# Altium PCB MediaControllerPCB.PcbDoc
Units mm, origin at the board's own origin, x right, y up, seen from the top; angles counter-clockwise.
Board outline 60.08 x 80.08 mm, 2 copper layers (Top Layer, Bottom Layer); 60 components, 40 nets, 222 pads, 50 vias.
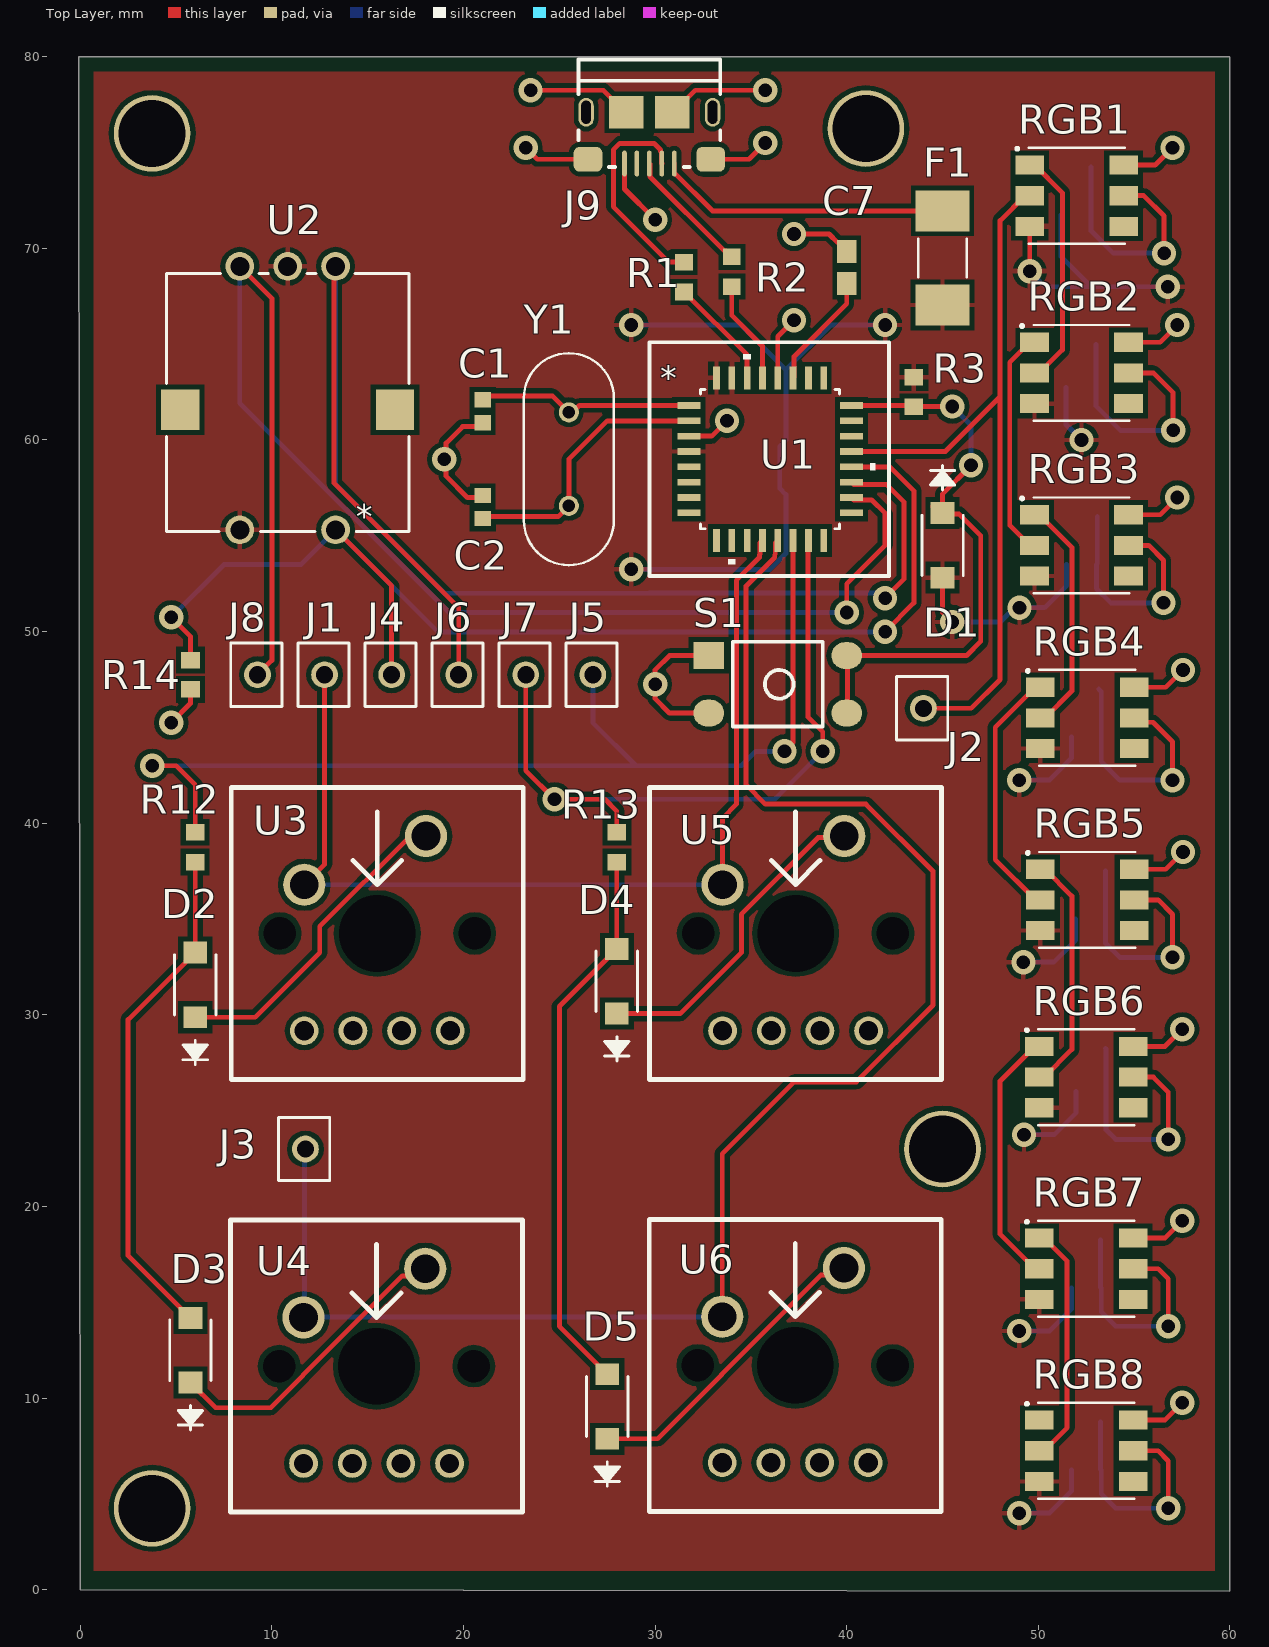
[diagram p0: Top Layer view]
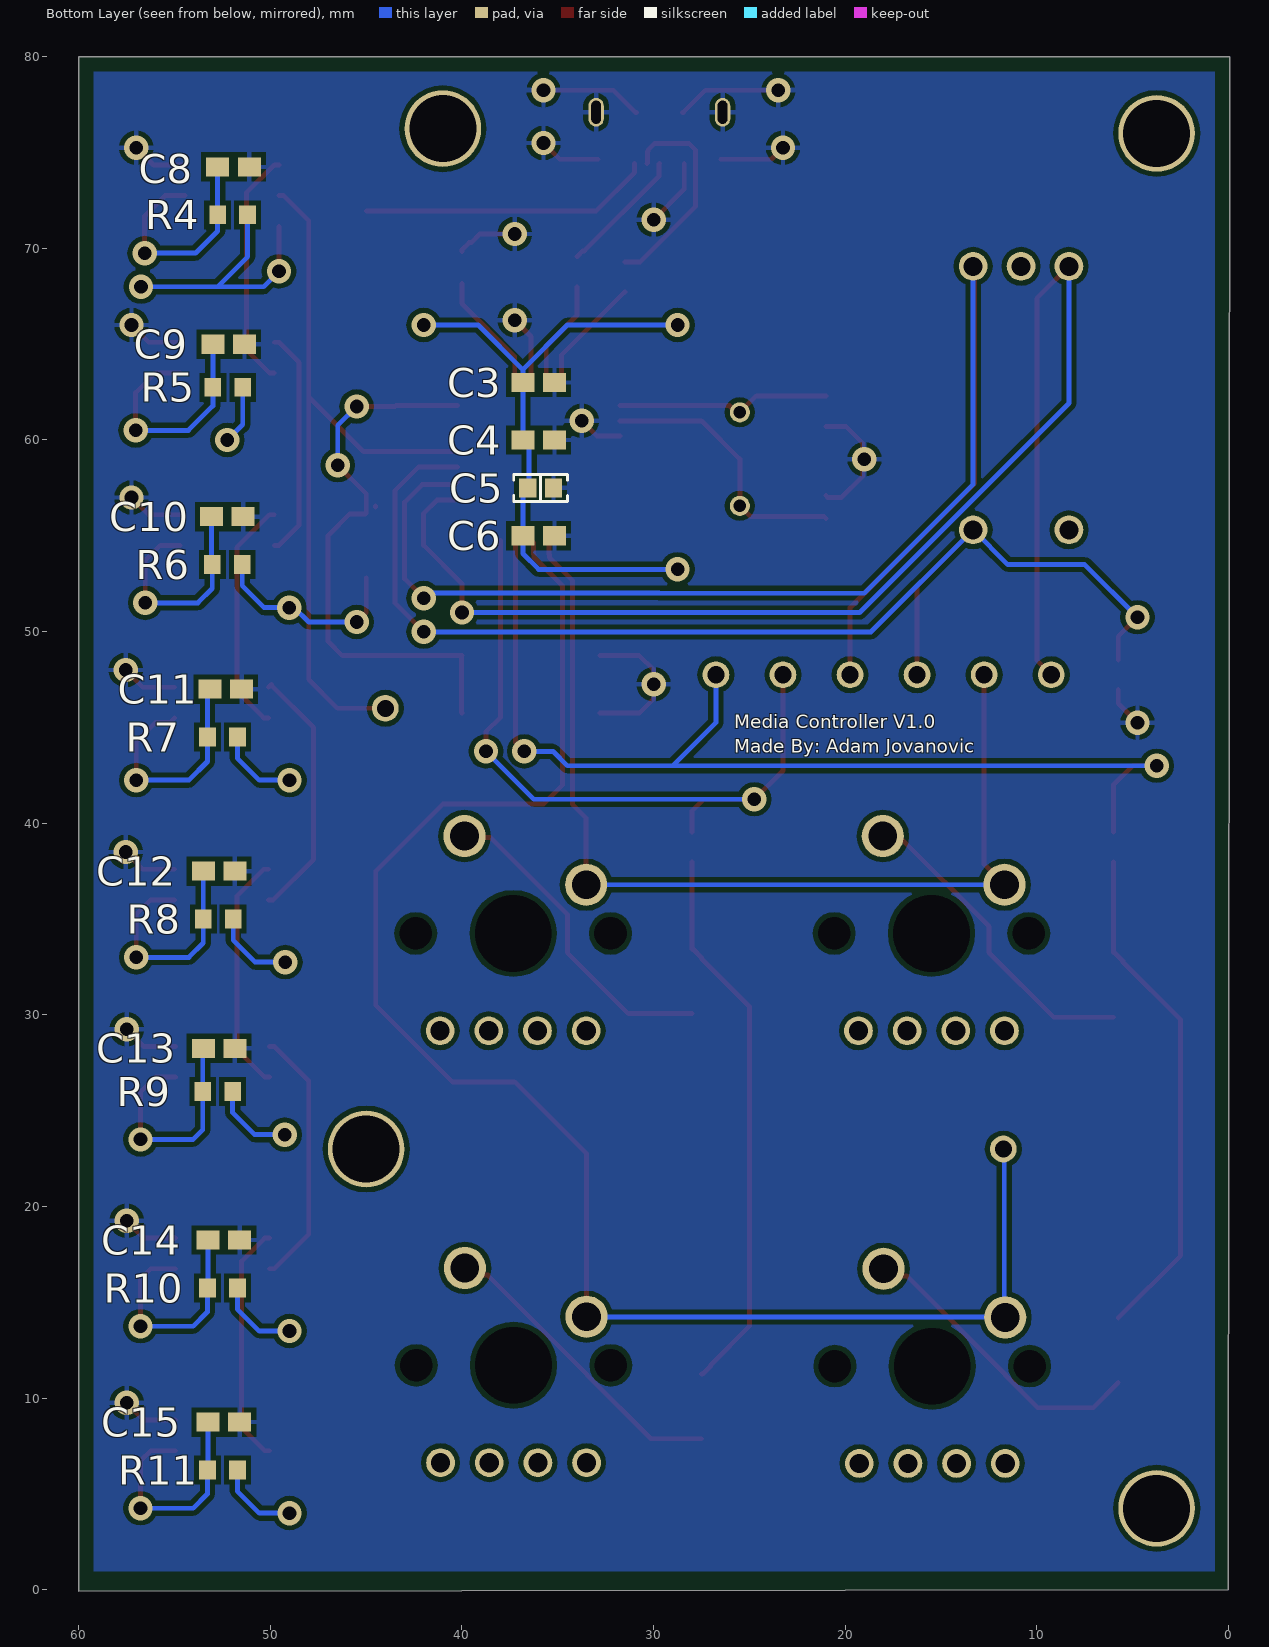
[diagram p1: Bottom Layer view, seen from below]
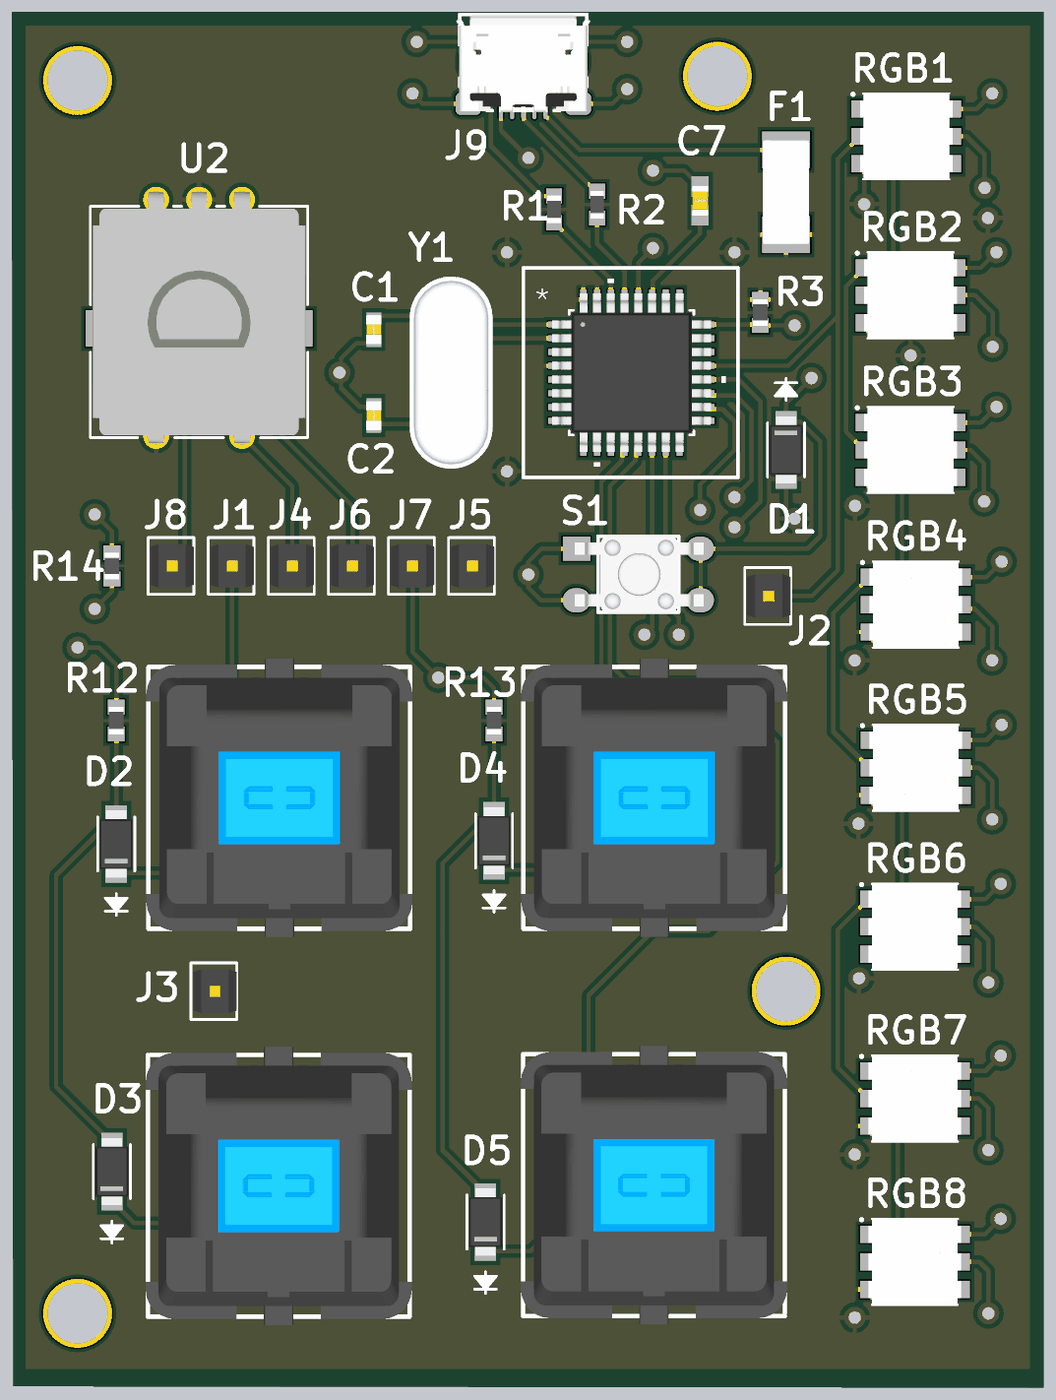
[diagram p2: 3D render of the assembled board from above, using the file's embedded part models]
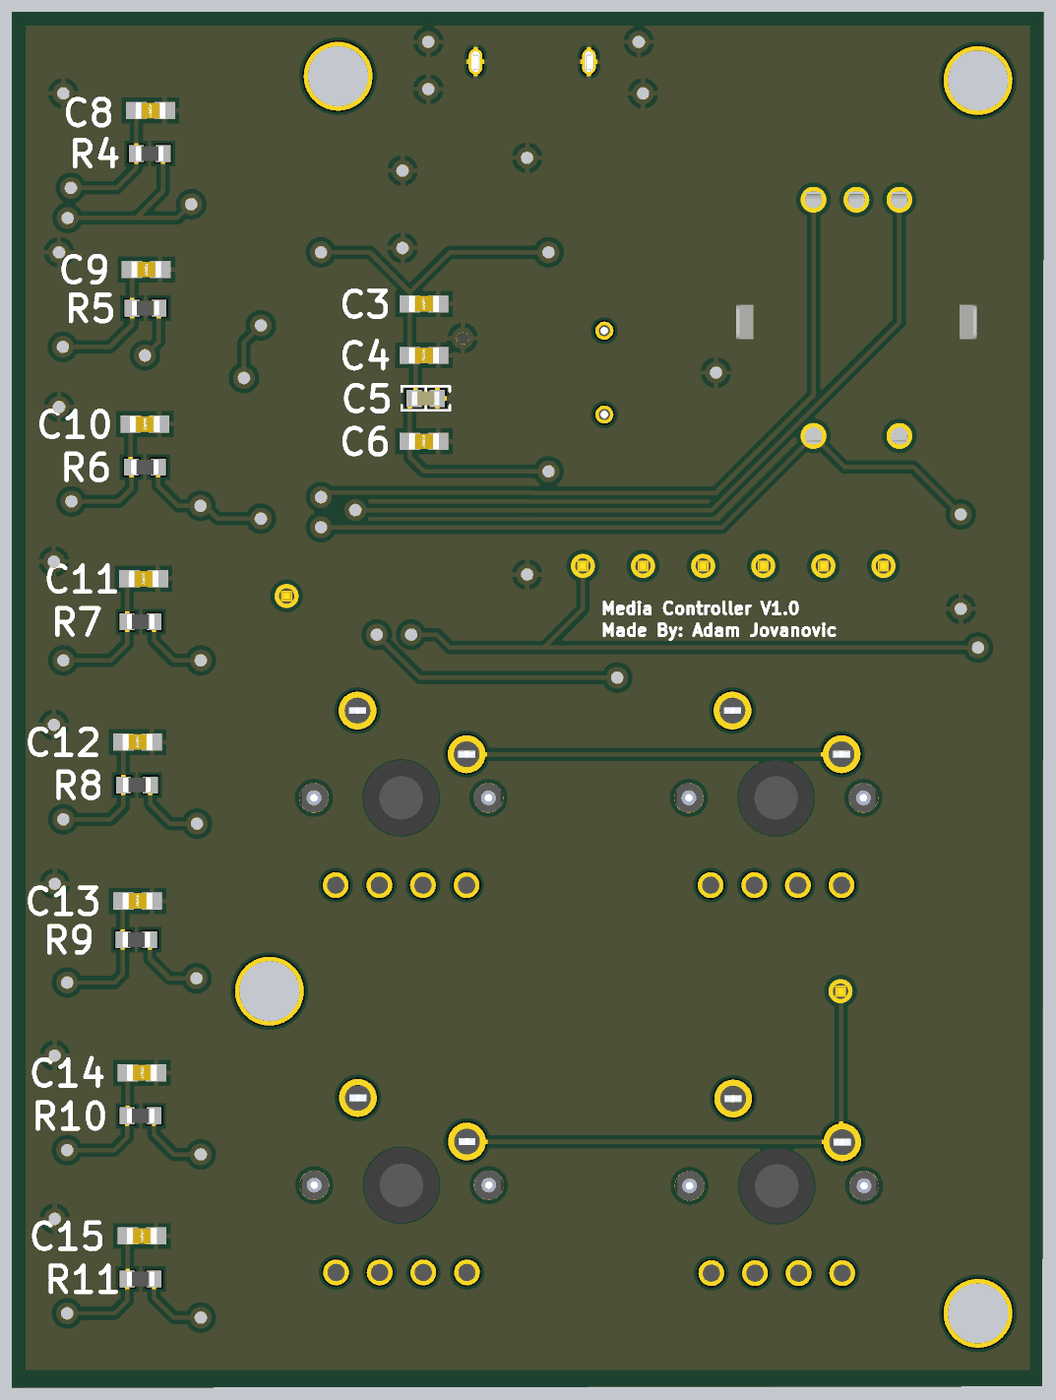
[diagram p3: 3D render of the assembled board from below, using the file's embedded part models]

## Layer stack, top to bottom
Top Solder: solder mask 0.0102, Solder Resist, Dk 3.5
Top Layer: signal copper 0.0356
Dielectric 1: dielectric 0.32, FR-4, Dk 4.8
Bottom Layer: signal copper 0.0356
Bottom Solder: solder mask 0.0102, Solder Resist, Dk 3.5

## Board outline
0,0 60,-0.079 60,80 -0.079,80

## Design rules (kind name [scope] priority, off if disabled: settings)
Clearance [All] p1: gap=0.254 ignorepadtopadclearanceinfootprint=TRUE except(0: Arc-Hole Track-Hole SMDPad-Hole THPad-Hole Via-Hole Fill-Hole Poly-Hole Region-Hole Text-Hole)
HoleSize [All] p1: absolutevalues=TRUE maxlimit=5 minlimit=0.3 maxpercent=80.000 minpercent=20.000
MatchedLengths [InNetClass('USB')] p1: tolerance=10 checknetsindiffpair=FALSE checkdiffpairvsdiffpair=TRUE checkxsignals=TRUE checkothers=TRUE
MinimumSolderMaskSliver [All] p1: minsoldermaskwidth=0.2
PolygonConnect [All] p1: connectstyle=Relief reliefconductorwidth=0.254 reliefentries=4 polygonreliefangle="90 Angle" airgapwidth=0.254
RoutingVias [All] p1: holewidth=0.711 width=1.27 viastyle="Through Hole" minholewidth=0.711 minwidth=1.27 maxholewidth=0.711 maxwidth=1.27
SilkToSolderMaskClearance [IsPad] p1: minsilkscreentomaskgap=0.1 clearancetoexposedcopper=TRUE
SolderMaskExpansion [All] p1: expansion=0.102 istentingtop=FALSE
Width [All] p1: maxlimit=0.254 minlimit=0.254 preferedwidth=0.254
27 further rules are at their usual default settings.

## Components (designator, comment, footprint, x,y, rotation, side; value= is the part's Value field where it differs from the comment)
C1 "10uF" CAPC17090_87N_KEM-L 21,61.5 r90 top
C2 "10uF" CAPC17090_87N_KEM-L 21,56.5 r270 top
C3 "100nF" CAPC0603_87N_KEM-M 36,63 r0 bottom
C4 "100nF" CAPC0603_87N_KEM-M 36,60 r0 bottom
C5 "10µF" "CAP 0603_1608" 35.9,57.5 r0 bottom
C6 "100nF" CAPC0603_87N_KEM-M 36,55 r0 bottom
C7 "1uF CAP" 1UFCAP-M 40,69 r270 top
C8 "100nF" CAPC0603_87N_KEM-M 51.925,74.25 r0 bottom
C9 "100nF" CAPC0603_87N_KEM-M 52.175,65 r0 bottom
C10 "100nF" CAPC0603_87N_KEM-M 52.25,56 r0 bottom
C11 "100nF" CAPC0603_87N_KEM-M 52.325,47 r0 bottom
C12 "100nF" CAPC0603_87N_KEM-M 52.675,37.5 r0 bottom
C13 "100nF" CAPC0603_87N_KEM-M 52.675,28.25 r0 bottom
C14 "100nF" CAPC0603_87N_KEM-M 52.425,18.25 r0 bottom
C15 "100nF" CAPC0603_87N_KEM-M 52.425,8.75 r0 bottom
D1 "RectifierDiode" DO-219AB_VIS-M 45,54.5 r270 top
D2 "RectifierDiode" DO-219AB_VIS-M 6,31.563 r90 top
D3 "RectifierDiode" DO-219AB_VIS-M 5.75,12.5 r90 top
D4 "RectifierDiode" DO-219AB_VIS-M 28,31.75 r90 top
D5 "RectifierDiode" DO-219AB_VIS-M 27.5,9.563 r90 top
F1 "500mAFuse" FUSC6125X279N 45,69.5 r270 top
J1 "Single Pin Header" CON1_1X1_TU_TSW 12.75,47.75 r90 top
J2 "Single Pin Header" CON1_1X1_TU_TSW 44,46 r90 top
J3 "Single Pin Header" CON1_1X1_TU_TSW 11.75,23 r90 top
J4 "Single Pin Header" CON1_1X1_TU_TSW 16.25,47.75 r90 top
J5 "Single Pin Header" CON1_1X1_TU_TSW 26.75,47.75 r90 top
J6 "Single Pin Header" CON1_1X1_TU_TSW 19.75,47.75 r90 top
J7 "Single Pin Header" CON1_1X1_TU_TSW 23.25,47.75 r90 top
J8 "Single Pin Header" CON1_1X1_TU_TSW 9.25,47.75 r90 top
J9 "10118193-0001LF" "FCI USB 10118193-0001LF" 29.7,77.05 r0 top
R1 "22R" RES0603_22OHM 31.5,68.5 r90 top
R2 "22R" RES0603_22OHM 34,68.78 r90 top
R3 "10KRES" RES0603 43.5,62.5 r90 top
R4 "150R" RES0608_150OHM 51.97,71.75 r0 bottom
R5 "150R" RES0608_150OHM 52.22,62.75 r0 bottom
R6 "150R" RES0608_150OHM 52.25,53.5 r0 bottom
R7 "150R" RES0608_150OHM 52.5,44.5 r0 bottom
R8 "150R" RES0608_150OHM 52.72,35 r0 bottom
R9 "150R" RES0608_150OHM 52.75,26 r0 bottom
R10 "150R" RES0608_150OHM 52.5,15.75 r0 bottom
R11 "150R" RES0608_150OHM 52.5,6.25 r0 bottom
R12 "150R" RES0608_150OHM 6,38.75 r90 top
R13 "150R" RES0608_150OHM 28,38.75 r90 top
R14 "10KRES" RES0603 5.75,47.75 r90 top
RGB1 "RGB-LED" LED_RGB 52,72.75 r0 top
RGB2 "RGB-LED" LED_RGB 52.25,63.5 r0 top
RGB3 "RGB-LED" LED_RGB 52.25,54.5 r0 top
RGB4 "RGB-LED" LED_RGB 52.55,45.5 r0 top
RGB5 "RGB-LED" LED_RGB 52.55,36 r0 top
RGB6 "RGB-LED" LED_RGB 52.5,26.75 r0 top
RGB7 "RGB-LED" LED_RGB 52.5,16.75 r0 top
RGB8 "RGB-LED" LED_RGB 52.5,7.25 r0 top
S1 "TacticalSwitch" TACTILESWITCH 32.8,48.75 r0 top
U1 "ATMEGA32U2-AU" 32A_ATM 36,59 r0 top
U2 "EN12-HS22AF20" EN12-HS_TTE 11,62.5 r180 top
U3 "Switch" CHERRYMX_5PIN 15.5,34.25 r0 top
U4 "Switch" CHERRYMX_5PIN 15.46,11.67 r0 top
U5 "Switch" CHERRYMX_5PIN 37.33,34.25 r0 top
U6 "Switch" CHERRYMX_5PIN 37.31,11.71 r0 top
Y1 "LFXTAL003240BULK" LFXTAL003240BULK 25.5,59 r90 top

## Footprints (in the part's own frame and the unit in brackets; to place one, negate y for a bottom-side part, rotate by r counter-clockwise, add the part's x,y. Pads: shape width x height; smd on the part's side, far side on the other; paste and mask are expansions set on the pad)
1UFCAP-M [mm]
  rect 1.2x1 smd paste+0 mask+0: 1(-0.825,0) 2(0.825,0)
  body extent -0.87,-0.48 0.87,0.48, height 0.91
32A_ATM [mm]
  rect 1.2x0.35 smd: 1(-4.242,2.8) 2(-4.242,2) 3(-4.242,1.2) 4(-4.242,0.4) 5(-4.242,-0.4) 6(-4.242,-1.2) 7(-4.242,-2) 8(-4.242,-2.8) 17(4.242,-2.8) 18(4.242,-2) 19(4.242,-1.2) 20(4.242,-0.4) 21(4.242,0.4) 22(4.242,1.2) 23(4.242,2) 24(4.242,2.8)
  rect 0.35x1.2 smd: 9(-2.8,-4.242) 10(-2,-4.242) 11(-1.2,-4.242) 12(-0.4,-4.242) 13(0.4,-4.242) 14(1.2,-4.242) 15(2,-4.242) 16(2.8,-4.242) 25(2.8,4.242) 26(2,4.242) 27(1.2,4.242) 28(0.4,4.242) 29(-0.4,4.242) 30(-1.2,4.242) 31(-2,4.242) 32(-2.8,4.242)
  silkscreen extent -6.3,-6.1 6.2,6.1, body extent -4.62,-4.62 4.62,4.62, height 1.2
"CAP 0603_1608" [mm] "Chip Capacitor, 2-Leads, Body 1.60x0.80mm, IPC Medium Density"
  rect 0.9x1 smd: 1(-0.675,0) 2(0.675,0)
  silkscreen extent -1.4,-0.7 1.4,0.7, body extent -0.8,-0.41 0.8,0.41, height 0.82
CAPC0603_87N_KEM-M [mm]
  rect 1.2x1 smd paste+0 mask+0: 1(-0.825,0) 2(0.825,0)
  body extent -0.88,-0.48 0.87,0.47, height 0.88
CAPC17090_87N_KEM-L [mm]
  rect 0.8x0.85 smd paste+0 mask+0: 1(-0.6,0) 2(0.6,0)
  body extent -0.85,-0.45 0.85,0.45, height 0.88
CHERRYMX_5PIN [mm] "Cherry MX 5 pin mechanical keyboard switch"
  round 2.2 hole 1.5: 1(-3.81,2.54) 2(2.54,5.08)
  round 1.5 hole 1: 3(-1.27,-5.08) 4(1.27,-5.08) 5(-3.81,-5.08) 6(3.81,-5.08)
  round 0 hole 1.7: PE(-5.08,0) PE(5.08,0)
  round 0 hole 4: PE(0,0)
  silkscreen extent -7.62,-7.62 7.62,7.62, body extent -7.75,-8.1 7.75,8.1, height 14.87
CON1_1X1_TU_TSW [mil]
  round 55 hole 35 mask+0: 1(0,0)
  silkscreen extent -65,-50 65,55, body extent -50,-50 50,50, height 500
DO-219AB_VIS-M [mm]
  rect 1.138x1.244 smd paste+0 mask+0: 1(-1.687,0) 2(1.687,0)
  silkscreen extent -4.16,-1.08 1.57,1.08, body extent -1.96,-0.95 1.96,0.95, height 0.83
EN12-HS_TTE [mil]
  round 59 hole 39 mask+0: 1(-91.54,-258.39) 2(105.32,-258.39) 3(6.89,-258.39) 4(-91.54,282.95) 5(105.32,282.95)
  rect 79x83 smd: 6(-213.61,36.61) 7(227.39,36.61)
  silkscreen extent -242,-243 256,287, body extent -269,-276 282,299, height 788
"FCI USB 10118193-0001LF" [mm] "USB 2.0 Type B Micro"
  oval 0.24x1.35 smd: 1(1.3,-2.625) 2(0.65,-2.625) 3(0,-2.625) 4(-0.65,-2.625) 5(-1.3,-2.625)
  oval 0.8x1.5 hole 0.5 slot 1.2 at 90 deg: S(-3.3,0.05) S(3.3,0.05)
  rrect50% 1.5x1.3 smd: S(-3.2,-2.4) S(3.2,-2.4)
  rect 1.8x1.7 smd: S(-1.2,0.05) S(1.2,0.05)
  silkscreen extent -3.7,-2.8 3.7,2.8, body extent -3.93,-2.9 3.93,2.76, height 2.78
FUSC6125X279N [mm]
  rect 2.15x2.8 smd: 1(-2.455,0) 2(2.455,0)
  silkscreen extent -1,-1.27 1,1.27, body extent -3.05,-1.4 3.05,1.39, height 2.55
LED_RGB [mm]
  rect 1.5x1 smd: 1(-2.45,1.6) 2(-2.45,0) 3(-2.45,-1.6) 4(2.45,-1.6) 5(2.45,0) 6(2.45,1.6)
  silkscreen extent -3.15,-2.5 2.5,2.5, body extent -2.7,-2.5 2.7,2.5, height 1.76
LFXTAL003240BULK [mm] "CRYSTAL 16.0000MHZ 30PF TH"
  round 1.05 hole 0.65: 1(-2.44,0) 2(2.44,0)
  silkscreen extent -5.53,-2.35 5.53,2.35, body extent -5.53,-2.35 5.52,2.35, height 4.11
RES0603 [mm]
  rect 0.86x0.98 smd: 1(-0.765,0) 2(0.765,0)
  body extent -0.78,-0.43 0.78,0.43, height 0.51
RES0603_22OHM [mm]
  rect 0.87x0.93 smd: 1(-0.78,0) 2(0.78,0)
  body extent -0.8,-0.4 0.8,0.4, height 0.55
RES0608_150OHM [mm]
  rect 0.87x0.98 smd: 1(-0.78,0) 2(0.78,0)
  body extent -0.8,-0.43 0.8,0.43, height 0.56
TACTILESWITCH [mm]
  rect 1.6x1.4 smd: 1(0,0)
  oval 1.6x1.4 smd: 2(0,-3) 3(7.2,-3) 4(7.2,0)
  silkscreen extent 1.25,-3.7 5.95,0.72, body extent -0.1,-3.75 7.4,0.75, height 3.7

## Part data
C1 C2: library part 10pFCap, "Multilayer Ceramic Capacitors MLCC - SMD/SMT 50V 10pF C0G 0603 5%", Manufacturer_Part_Number=CBR06C100J5GAC, Built_By=EMA_Frank, Copyright="Copyright (C) 2021 Accelerated Designs. All rights reserved", RefDes=RefDes, Source_Library=Kemet_2020-03-25_3.xlr, SourceLibrary=Kemet_2020-03-25_3, Type=DEV, Vendor=Kemet
C3 C4 C6 C8 C9 C10 C11 C12 C13 C14 C15: library part C0603C103J5JACTU, "CAP CER 10000PF 50V U2J 0603", Capacitance=10nF, Case Code (Imperial)=0603, Case Code (Metric)=1608, Dielectric=U2J, Manufacturer=KEMET, Max Operating Temperature=125°C, Min Operating Temperature=-55°C, Supplier Part Number 1=399-13384-1-ND, Tolerance=5%, Voltage Rating=50V, Case/Package=0603, Category="Ceramic Capacitors", ComponentLink1Description=http://www.farnell.com/datasheets/2600114.pdf?src-supplier=Farnell, ComponentLink1URL=http://www.farnell.com/datasheets/2600114.pdf?src-supplier=Farnell, ComponentLink2Description=http://www.farnell.com/datasheets/2157975.pdf?src-supplier=Element14, ComponentLink2URL=http://www.farnell.com/datasheets/2157975.pdf?src-supplier=Element14, ComponentLink3Description=https://api.kemet.com/component-edge/download/datasheet/C0603C103J5JAC7867.pdf?src-supplier=Digi-Key, ComponentLink3URL=https://api.kemet.com/component-edge/download/datasheet/C0603C103J5JAC7867.pdf?src-supplier=Digi-Key, ComponentLink4Description=http://www.kemet.com/docfinder?Partnumber=C0603C103J5JAC7867&src-supplier=Digi-Key, ComponentLink4URL=http://www.kemet.com/docfinder?Partnumber=C0603C103J5JAC7867&src-supplier=Digi-Key, Length=0.063inch, Manufacturer Part Number=C0603C103J5JACTU, Mount="Surface Mount", Packaging="Cut Tape", Pricing 1="1=0.30000, 10=0.20400, 50=0.13560, 100=0.11530, 500=0.08142, 1000=0.07124 (USD)", REACH SVHC="No SVHC", RoHS=Yes, RoHS Compliant=Yes, Stock 1=2465, Supplier 1=Digi-Key, Thickness=0.034inch, Width=0.032inch
C5: library part GRM188R61E106MA73D, "CAP CER 10UF 25V X5R 0603", Device Package="0603 (1608 Metric)", Manufacturer="Murata Electronics", Operating Temperature="-55°C ~ 85°C", Supplier Part Number 1=490-7202-1-ND, Temperature Coefficient=X5R, Tolerance=±20%, Voltage - Rated=25V, Applications="General Purpose", Capacitance=10µF, ComponentLink1Description=Datasheet, ComponentLink1URL=https://www.murata.com/~/media/webrenewal/support/library/catalog/products/capacitor/mlcc/c02e.ashx?la=en-us, ComponentLink2Description="DigiKey Link", ComponentLink2URL=http://digikey.com/product-detail/en/murata-electronics/GRM188R61E106MA73D/490-7202-1-ND/3900486, LastUpdated="2/09/2020 1:03:25 AM", Lifecycle Status=Active, Minimum Order=1, Mounting Type="Surface Mount, MLCC", Package / Case="0603 (1608 Metric)", Packaging=TapeAndReel, Part Number=GRM188R61E106MA73D, Part Status=Active, PartId=8314, Price=0.09, Series=GRM, Size / Dimension="0.063\" L x 0.031\" W (1.60mm x 0.80mm)", Supplier 1=DigiKey, Thickness (Max)="0.031\" (0.80mm)"
C7: library part 1uFCap, "KEMET - C0603C105K8PACTU - SMD Multilayer Ceramic Capacitor, 1 µF, 10 V, 0603 [1608 Metric], ± 10%, X5R, C Series KEMET", Capacitance=1uF, Case Code (Imperial)=0603, Case Code (Metric)=1608, Dielectric=X5R, Dielectric Material=Ceramic, Manufacturer=KEMET, Manufacturer Part Number=C0603C105K8PACTU, Max Operating Temperature=85°C, Min Operating Temperature=-55°C, Package Quantity=1, Supplier Part Number 1=399-3118-1-ND, Tolerance=10%, Voltage=10V, Case/Package=0603, Category="Ceramic Capacitors", ComponentLink1Description=https://datasheet.ciiva.com/11787/0900766b8116eb59-11787747.pdf?src-supplier=RSComponents, ComponentLink1URL=https://datasheet.ciiva.com/11787/0900766b8116eb59-11787747.pdf?src-supplier=RSComponents, ComponentLink2Description=https://datasheet.ciiva.com/6074/40889-6074647.pdf?src-supplier=Farnell, ComponentLink2URL=https://datasheet.ciiva.com/6074/40889-6074647.pdf?src-supplier=Farnell, ComponentLink3Description=https://datasheet.ciiva.com/26847/getdatasheetpartid-385480-26847548.pdf?src-supplier=Verical, ComponentLink3URL=https://datasheet.ciiva.com/26847/getdatasheetpartid-385480-26847548.pdf?src-supplier=Verical, ComponentLink4Description=https://datasheet.ciiva.com/7823/40889-7823998.pdf?src-supplier=Element14, ComponentLink4URL=https://datasheet.ciiva.com/7823/40889-7823998.pdf?src-supplier=Element14, ComponentLink5Description=https://datasheet.ciiva.com/7823/1929483-7823999.pdf?src-supplier=Element14, ComponentLink5URL=https://datasheet.ciiva.com/7823/1929483-7823999.pdf?src-supplier=Element14, ComponentLink6Description=https://datasheet.ciiva.com/28645/1831760-28645655.pdf?src-supplier=Element14, ComponentLink6URL=https://datasheet.ciiva.com/28645/1831760-28645655.pdf?src-supplier=Element14, Construction=Flat, Depth=0.8mm, Height=0.8mm, Lead Free="Lead Free", Length=1.6mm, Mount="Surface Mount", Number of Pins=2, Packaging="Tape and Reel", Pricing 1="1=0.10000, 10=0.05600, 50=0.03040, 100=0.02480, 500=0.01772, 1000=0.01392 (USD)", Radiation Hardening=No, REACH SVHC="No SVHC", RoHS=Yes, RoHS Compliant=Yes, Series=C, Stock 1=16016, Supplier 1=Digi-Key, Termination=SMD/SMT, Thickness=0.035inch, Voltage Rating=10V, Voltage Rating (DC)=10V, Weight=7.1E-05oz, Width=0.031inch
D1 D2 D3 D4 D5: library part ES07D-GS08, "VISHAY - ES07D-GS08 - Fast / Ultrafast Diode, 200 V, 1.2 A, Single, 980 mV, 25 ns, 30 A", Manufacturer=Vishay, Supplier Part Number 1=ES07D-GS08CT-ND, Category="Rectifier Diodes", ComponentLink1Description=http://www.farnell.com/datasheets/2046053.pdf?src-supplier=Farnell, ComponentLink1URL=http://www.farnell.com/datasheets/2046053.pdf?src-supplier=Farnell, Manufacturer Part Number=ES07D-GS08, Pricing 1="1=0.45000, 10=0.36200, 100=0.24640, 500=0.18480, 1000=0.13860 (USD)", RoHS=Yes, RoHS Compliant=Yes, Stock 1=4306, Supplier 1=Digi-Key
F1: library part Fuse, "Fuse Chip Fast Acting 0.5A 350V Solder Pad SMD 2410 Ceramic T/R", Case Code (Imperial)=2410, Case Code (Metric)=6125, Current Rating=500mA, DC Cold Resistance=240mR, Manufacturer=Bel, Manufacturer Part Number=0679H0500-05, Max Operating Temperature=125°C, Min Operating Temperature=-55°C, Supplier Part Number 1=507-2043-2-ND, Voltage Rating (AC)=350V, Voltage Rating (DC)=72V, Approvals=cURus, Case/Package=2410, Category=Fuses, ComponentLink1Description=https://www.mouser.com/ds/2/643/0679H_Jan_2017-1131342.pdf?src-supplier=Mouser, ComponentLink1URL=https://www.mouser.com/ds/2/643/0679H_Jan_2017-1131342.pdf?src-supplier=Mouser, ComponentLink2Description=https://www.belfuse.com/resources/CircuitProtection/datasheets/0679H%20Jan%202017.pdf?src-supplier=Digi-Key, ComponentLink2URL=https://www.belfuse.com/resources/CircuitProtection/datasheets/0679H%20Jan%202017.pdf?src-supplier=Digi-Key, Fuse Type="Board Mount (Cartridge Style Excluded)", Mount="Surface Mount", Packaging="Tape and Reel", Pricing 1="5000=0.14057, 10000=0.13120 (USD)", RoHS=Yes, RoHS Compliant=Yes, Stock 1=5000, Supplier 1=Digi-Key
J1 J2 J3 J4 J5 J6 J7 J8: library part TSW-101-07-F-S, "Samtec TSW, 1 Way, 1 Row, Straight PCB Header", Flammability Rating="UL94 V-0", Insulation Color=Black, Manufacturer=Samtec, Max Operating Temperature=125°C, Min Operating Temperature=-55°C, Supplier Part Number 1=SAM10323-ND, Category=Connectors, ComponentLink1Description=https://datasheet.ciiva.com/10337/htsw-th-10337052.pdf?src-supplier=Avnet, ComponentLink1URL=https://datasheet.ciiva.com/10337/htsw-th-10337052.pdf?src-supplier=Avnet, Connector Type=Header, Contact Finish - Mating=GOLD, Contact Material=Bronze, Contact Plating=Gold, Contact Shape=Square, Contact Type="Male Pin", Fastening Type=Pull, Gender=Male, Insulation Material=PBT, Manufacturer Part Number=TSW-101-07-F-S, Mount="Through Hole", Number of Contacts=1, Number of Positions=1, Number of Rows=1, Packaging=Bulk, Pricing 1="1=0.16000, 10=0.15200, 100=0.10500, 500=0.08888, 1000=0.07272, 5000=0.06464, 10000=0.05858 (USD)", Radiation Hardening=No, REACH SVHC="No SVHC", RoHS=Yes, RoHS Compliant=Yes, Series=TSW, Stock 1=6946, Supplier 1=Digi-Key, Termination=Solder
J9: "CONN RCPT USB2.0 MICRO B SMD R/A", Current Rating (Amps)="1.8A per Contact", Manufacturer="Amphenol ICC (FCI)", Operating Temperature="-30°C ~ 80°C", Supplier Part Number 1=609-4616-2-ND, Voltage - Rated=100VAC, ComponentLink1Description=Datasheet, ComponentLink1URL=https://cdn.amphenol-icc.com/media/wysiwyg/files/documentation/datasheet/inputoutput/io_usb_micro.pdf, ComponentLink2Description="DigiKey Link", ComponentLink2URL=//digikey.com/product-detail/en/amphenol-icc-fci/10118193-0001LF/609-4616-2-ND/2785388, Connector Type="USB - micro B", Features="Solder Retention", Gender=Receptacle, LastUpdated="9/12/2019 8:51:28 PM", Lifecycle Status=0, Mating Cycles=10000, Minimum Order=1, Mounting Feature=Horizontal, Mounting Type="Surface Mount, Right Angle; Through Hole", Number of Contacts=5, Number of Ports=1, Packaging=TapeAndReel, Part Number=10118193-0001LF, Part Status=Active, Price=0.21, Series=-, Shielding=Shielded, Specifications="USB 2.0", Supplier 1=DigiKey, Termination=Solder
R1 R2: library part 22Res, "RES SMD 22 OHM 5% 1/4W 0603", Case Code (Imperial)=0603, Case Code (Metric)=1608, Manufacturer="Vishay Dale", Manufacturer Part Number=RCS060322R0JNEA, Max Operating Temperature=155°C, Max Power Dissipation=250mW, Min Operating Temperature=-55°C, Resistor Type="Thick Film", Supplier Part Number 1=541-2809-1-ND, Temperature Coefficient=200ppm/°C, Tolerance=5%, Case/Package=0603, Category="Chip SMD Resistors", ComponentLink1Description=http://www.vishay.com/docs/20065/rcse3.pdf?src-supplier=Digi-Key, ComponentLink1URL=http://www.vishay.com/docs/20065/rcse3.pdf?src-supplier=Digi-Key, Features="Automotive AEC-Q200", Height=0.02inch, Length=0.061inch, Number of Terminations=2, Packaging="Tape and Reel", Pricing 1="1=0.15000, 10=0.13500, 100=0.05180, 1000=0.02277, 2500=0.01966 (USD)", Resistance=22R, RoHS=Yes, Stock 1=8840, Supplier 1=Digi-Key, Width=0.033inch
R3 R14: library part 10kRes, "Res Thick Film 0603 10K Ohm 5% 1/10W ±200ppm/°C Molded SMD", Case Code (Imperial)=0603, Case Code (Metric)=1608, Manufacturer="Vishay Dale", Manufacturer Part Number=RCG060310K0JNEA, Max Operating Temperature=155°C, Max Power Dissipation=100mW, Min Operating Temperature=-55°C, Package Quantity=1, Resistance=10kR, Resistor Type="Thick Film", Supplier Part Number 1=541-1804-1-ND, Temperature Coefficient=200ppm/°C, Tolerance=5%, Voltage Rating=75V, Case/Package=0603, Category=Resistors, ComponentLink1Description=https://datasheet.ciiva.com/18596/rcge3-18596768.pdf?src-supplier=Digi-Key, ComponentLink1URL=https://datasheet.ciiva.com/18596/rcge3-18596768.pdf?src-supplier=Digi-Key, Height=0.02inch, Length=0.061inch, Number of Terminations=2, Packaging="Tape and Reel", Power Rating=100mW, Pricing 1="1=0.10000, 10=0.08700, 100=0.03340, 1000=0.01467, 2500=0.01267 (USD)", RoHS=Yes, RoHS Compliant=Yes, Stock 1=1090, Supplier 1=Digi-Key, Weight=7.1E-05oz, Width=0.033inch
R4 R5 R6 R7 R8 R9 R10 R11 R12 R13: library part CRCW0603150RFKEAHP, "Res Thick Film 0603 150 Ohm 1% 0.33W(1/3W) ±100ppm/°C Pad SMD Automotive T/R", Case Code (Imperial)=0603, Case Code (Metric)=1608, Manufacturer=Vishay, Max Operating Temperature=155°C, Max Power Dissipation=250mW, Min Operating Temperature=-55°C, Package Quantity=1, Resistance Tolerance=1%, Resistor Type="Thick Film", Supplier Part Number 1=541-150SCT-ND, Temperature Coefficient=100ppm/°C, Voltage Rating=75V, Case/Package=0603, Category="Chip SMD Resistors", ComponentLink1Description=https://datasheet.ciiva.com/6551/crcwhpe3-6551676.pdf?src-supplier=Digi-Key, ComponentLink1URL=https://datasheet.ciiva.com/6551/crcwhpe3-6551676.pdf?src-supplier=Digi-Key, ComponentLink2Description=https://datasheet.ciiva.com/12559/crcwhpe3-46056-12559198.pdf?src-supplier=Mouser, ComponentLink2URL=https://datasheet.ciiva.com/12559/crcwhpe3-46056-12559198.pdf?src-supplier=Mouser, Construction=Rectangular, Contact Plating=Tin, Depth=0.85mm, Features="Automotive AEC-Q200", Height=0.45mm, Lead Free="Lead Free", Length=1.55mm, Manufacturer Part Number=CRCW0603150RFKEAHP, Military Standard=Not, Mount="Surface Mount", Number of Terminations=2, Packaging="Tape and Reel", Power Rating=250mW, Pricing 1="1=0.17000, 10=0.14800, 100=0.05790, 1000=0.02422, 2500=0.02220 (USD)", Radiation Hardening=No, REACH SVHC=Unknown, Resistance=150R, RoHS=Yes, RoHS Compliant=Yes, Series=CRCW-HP, Stock 1=10924, Supplier 1=Digi-Key, Technology="THICK FILM", Termination=SMD/SMT, Tolerance=1%, Voltage Rating (DC)=75V, Weight=7.1E-05oz, Width=0.033inch
RGB1 RGB2 RGB3 RGB4 RGB5 RGB6 RGB7 RGB8: library part LED_RGB, "ADDRESS LED DISCRETE SERIAL RGB", Color=Blue,Green,Red, Manufacturer=SparkFun, Manufacturer Part Number=COM-11821, Supplier Part Number 1=1568-1800-ND, ComponentLink1Description=https://media.digikey.com/pdf/Data%20Sheets/Sparkfun%20PDFs/WS2812_Breakout_Hookup_Guide.pdf?src-supplier=Digi-Key, ComponentLink1URL=https://media.digikey.com/pdf/Data%20Sheets/Sparkfun%20PDFs/WS2812_Breakout_Hookup_Guide.pdf?src-supplier=Digi-Key, ComponentLink2Description=http://cdn.sparkfun.com/datasheets/Components/LED/WS2812.pdf?src-supplier=Digi-Key, ComponentLink2URL=http://cdn.sparkfun.com/datasheets/Components/LED/WS2812.pdf?src-supplier=Digi-Key, Interface=Serial, Length=5mm, Mount="Surface Mount", Number of LEDs=1, Pricing 1="1=0.50000 (USD)", RoHS=No, Stock 1=3968, Supplier 1=Digi-Key, Width=5mm
S1: "E-SWITCH - TL3305AF160QG - TACTILE SW, SPST, 0.05A, 12VDC, SOLDER", Manufacturer=E-Switch, Manufacturer Part Number=TL3305AF160QG, Max Operating Temperature=70°C, Min Operating Temperature=-20°C, Operating Force=160gf, Supplier Part Number 1=EG5350CT-ND, Actuator Type=Standard, Category="Tactile Switches", ComponentLink1Description=http://www.farnell.com/datasheets/2554191.pdf?src-supplier=Farnell, ComponentLink1URL=http://www.farnell.com/datasheets/2554191.pdf?src-supplier=Farnell, ComponentLink2Description=http://spec_sheets.e-switch.com/specs/P010468.pdf?src-supplier=Digi-Key, ComponentLink2URL=http://spec_sheets.e-switch.com/specs/P010468.pdf?src-supplier=Digi-Key, ComponentLink3Description=http://www.farnell.com/datasheets/2554191.pdf?src-supplier=Newark, ComponentLink3URL=http://www.farnell.com/datasheets/2554191.pdf?src-supplier=Newark, Illumination Type=Non-Illuminated, Lead Free="Lead Free", Mechanical Life=500000Cycles, Mount="Surface Mount", Packaging="Tape and Reel", Pricing 1="1=0.18000, 10=0.17900, 25=0.16960, 100=0.15400, 250=0.14480, 500=0.13246, 1000=0.11090 (USD)", RoHS=Yes, RoHS Compliant=Yes, Stock 1=60105, Supplier 1=Digi-Key, Switch Function=Off-Mom, Switch Travel=0.2mm, Termination="Gull Wing", Throw Configuration=SPST
U1: "8-bit Microcontroller with 8/16/32K Bytes of ISP Flash and USB Controller", Built_By=EMA_UL_Team, Copyright="Copyright (C) 2021 Accelerated Designs. All rights reserved", Manufacturer_Part_Number=ATMEGA32U2-AU, RefDes=RefDes, SourceLibrary=Atmel_2011-04-02, Type=DEV, Vendor=Atmel
U2: "BI TECHNOLOGIES / TT ELECTRONICS         EN12-HS22AF20             INCREMENTAL ENCODER", Manufacturer="TT BI", Max Operating Temperature=85°C, Min Operating Temperature=-30°C, Nominal Supply Voltage (DC)=5V, Package Quantity=300, Supplier Part Number 1=987-1195-ND, Actuator Type=Shaft, Built in Switch=Yes, Category=Uncategorized, ComponentLink1Description=https://datasheet.ciiva.com/30179/en12-30179331.pdf?src-supplier=Onlinecomponents.com, ComponentLink1URL=https://datasheet.ciiva.com/30179/en12-30179331.pdf?src-supplier=Onlinecomponents.com, ComponentLink2Description=https://datasheet.ciiva.com/1311/219240-1311686.pdf?src-supplier=Element14, ComponentLink2URL=https://datasheet.ciiva.com/1311/219240-1311686.pdf?src-supplier=Element14, Detent=Yes, Encoder Type=Mechanical, Lead Free="Lead Free", Manufacturer Part Number=EN12-HS22AF20, Mount="Through Hole,PCB", Number of Channels=2, Operating Supply Voltage=5V, Orientation=Vertical, Output Type=Quadrature,Incremental, Packaging=Bulk, Pricing 1="1=1.31000, 5=1.23800, 10=1.15900, 25=1.06400, 40=0.99375, 80=0.89688, 230=0.84839, 440=0.79991, 945=0.75144 (USD)", Pulses per Revolution=24, REACH SVHC="No SVHC", RoHS=Yes, RoHS Compliant=Yes, Series=EN12, Stock 1=1275, Supplier 1=Digi-Key, Termination="PC Pin"
U3 U4 U5 U6: library part CherryMXKeyswitch, "ZF CHERRY   MX1A-E1NN   SWITCH, TACTILE, SPST-NO, 10mA, THOUGH HOLE", Contact Current Rating=10mA, Contact Resistance=200mR, Manufacturer=Cherry, Manufacturer Part Number=MX1A-E1NN, Max Operating Temperature=70°C, Max Voltage Rating (AC)=12V, Min Operating Temperature=-10°C, Operating Force=0.5N, Supplier Part Number 1=CH196-ND, Actuator Length=3.6mm, Category="Pushbutton Switches", ComponentLink1Description=https://datasheet.ciiva.com/2870/mxseries-2870411.pdf?src-supplier=Digi-Key, ComponentLink1URL=https://datasheet.ciiva.com/2870/mxseries-2870411.pdf?src-supplier=Digi-Key, Contact Material=Gold,Silver, Contact Plating=Gold, Current Rating=10mA, Electrical Life=20000000Cycles, Housing Material=Thermoplastic, Illumination Type=Illuminated, Lead Free="Lead Free", Length=15.6mm, Max Current Rating=10mA, Max Voltage Rating (DC)=12V, Mechanical Life=20000000Cycles, Mount="Panel,Front,Through Hole", Number of Pins=2, Number of Terminals/Pins=2, Orientation=Straight, Packaging=Bulk, Pricing 1="1=1.07000, 10=0.95700, 25=0.90880, 50=0.86460, 100=0.82420, 250=0.78780, 500=0.70700, 1000=0.66660 (USD)", REACH SVHC="No SVHC", RoHS=Yes, RoHS Compliant=Yes, Row Spacing=2.54mm, Series=MX, Stock 1=7601, Supplier 1=Digi-Key, Switch Function=Off-Mom, Terminal Pitch=6.35mm, Termination="PC Pin", Throw Configuration=SPST, Voltage Rating (AC)=12V, Voltage Rating (DC)=12V, Width=15.6mm
Y1: "16MHz Â±30ppm Crystal 30pF 40 Ohms HC-49/US", Package="HC-49/US IQD Frequency Products", Supplier Part Number 1=1923-1433-ND, Availability=Unavailable, MF="IQD Frequency Products", MP=LFXTAL003240BULK, Price=None, SnapEDA_Link=https://www.snapeda.com/parts/LFXTAL003240BULK/IQD%20Frequency%20Products/view-part/2463585/?ref=snap, Supplier 1=Digi-Key

## Free pads (board coordinates)
  round 4 hole 3.5: M1(3.75,4.25) M1(3.75,76) M1(41,76.25) M1(45,23)

## Via types
v1: diameter 1.27, hole 0.711, Top Layer to Bottom Layer, tented both sides, 50 vias

## Nets (pads, with @x,y where several pads share a name; then routed paths per layer and width w, separated by ;. In a path a pad name is that pad's centre, name@x,y a point inside that pad or via, vN(x,y) a via of type N, cw(c..) or ccw(c..) an arc to the next point about the centre after c; other vN are vias at no path point)
COL0: J1.1 U1.12 U3.1 U5.1 | length 52.1
  Top Layer w0.254: U3.1 12.75,37.85 J1.1 ; U5.1 33.52,40.27 34.242,40.992 34.242,52.672 35.44,53.869 35.44,54.005 35.468,54.034 35.468,54.627 U1.12
  Bottom Layer w0.254: U3.1 U5.1
COL1: J3.1 U1.13 U4.1 U6.1 | length 85.4
  Top Layer w0.254: U6.1 33.5,22.75 37.25,26.5 40.5,26.5 44.5,30.5 44.5,37.5 41,41 35.75,41 34.75,42 34.75,52.38 36.24,53.869 36.24,54.005 36.268,54.034 36.268,54.627 U1.13
  Bottom Layer w0.254: U4.1 U4.1@11.67,14.23 ; J3.1 11.7,22.95 11.7,14.26 U4.1@11.67,14.23 ; U6.1 33.48,14.23 U4.1@11.67,14.23
D+: J9.3 R2.2 | length 6.7
  Top Layer w0.254: J9.3 29.728,74.397 29.728,73.75 33.61,69.868 33.692,69.868 R2.2
D-: J9.2 R1.2 | length 11.3
  Top Layer w0.254: J9.2 30.322,74.453 30.322,75.031 30.281,75.072 30.281,75.141 29.941,75.481 28.159,75.481 27.819,75.141 27.819,72.181 30.72,69.28 R1.2
EncoderA: J6.1 U1.19 U2.1 | length 75.2
  Top Layer w0.254: U2.1 13.25,68.988 13.25,57.75 19.75,51.25 J6.1 ; U1.19 40.373,57.668 42.082,57.668 42.992,56.758 42.992,52.75 42,51.758 v1(42,51.75)
  Bottom Layer w0.254: U2.1 13.325,57.683 19.008,52 29.698,52 29.714,52.016 41.734,52.016 v1(42,51.75)
EncoderB: J8.1 U1.18 U2.2 | length 73.8
  Top Layer w0.254: U2.2 10,67.388 10,48.5 J8.1 ; v1(40,51) 40,52.5 42,54.5 42,56.167 41.299,56.868 40.373,56.868 U1.18
  Bottom Layer w0.254: U2.2 8.325,61.925 19.25,51 v1(40,51)
EncoderSW: J4.1 R14.2 U1.20 U2.4 | length 64.5
  Top Layer w0.254: v1(4.75,50.75) 5.75,49.75 R14.2 ; U2.4 16.25,52.388 J4.1 ; U1.20 42.251,58.6 43.5,57.351 43.5,51.5 v1(42,50)
  Bottom Layer w0.254: v1(4.75,50.75) 7.5,53.5 11.512,53.5 U2.4 18.654,49.984 41.984,49.984 v1(42,50)
GND: C1.1 C2.1 C3.1 C4.1 C5.1 C6.1 C7.1 C8.1 C9.1 C10.1 C11.1 C12.1 C13.1 C14.1 C15.1 J9.5 J9.S R14.1 RGB1.6 RGB2.6 RGB3.6 RGB4.6 RGB5.6 RGB6.6 RGB7.6 RGB8.6 S1.1 S1.2 U1.3 U1.28 | length 69.7
  Top Layer w0.254: v1(4.75,45.25) 5.75,46.25 R14.1 ; C2.1 20.9,57 20.199,57 19.089,58.109 19.089,58.911 v1(19,59) 19.089,59.089 19.089,59.839 19.95,60.7 C1.1@21,60.7 ; v1(23.25,75.25) 23.85,74.65 J9.S@26.5,74.65 ; v1(23.5,78.25) 27.3,78.25 28.45,77.1 J9.S@28.5,77.1 ; J9.5 28.4,73.1 v1(30,71.5) ; J9.S@30.9,77.1 30.95,77.1 32.1,78.25 v1(35.75,78.25) ; U1.3 32.95,60.2 v1(33.75,61) ; S1.2 30.75,45.75 30,46.5 30,48 30.75,48.75 S1.1 ; J9.S@32.9,74.65 34.9,74.65 v1(35.75,75.5) ; U1.28 36.4,65.4 v1(37.25,66.25) ; v1(37.25,70.75) 39.075,70.75 39.527,70.298 39.627,70.298 40,69.925 C7.1 ; RGB1.6 56.1,74.35 v1(57,75.25) ; RGB3.6 56.35,56.1 v1(57.25,57) ; RGB2.6 56.35,65.1 v1(57.25,66) ; RGB8.6 56.6,8.85 v1(57.5,9.75) ; RGB7.6 56.6,18.35 v1(57.5,19.25) ; RGB6.6 56.6,28.35 v1(57.5,29.25) ; RGB5.6 56.65,37.6 v1(57.55,38.5) ; RGB4.6 56.65,47.1 v1(57.55,48)
  other v1: 30,47.25
NetC8_2: C8.2 R4.2 RGB1.5 | length 12.1
  Top Layer w0.254: RGB1.5 55.5,72.75 56.56,71.69 v1(56.56,69.75)
  Bottom Layer w0.254: C8.2 52.75,70.908 53.908,69.75 v1(56.56,69.75)
NetC9_2: C9.2 R5.2 RGB2.5 | length 12.5
  Top Layer w0.254: RGB2.5 56,63.5 57.03,62.47 v1(57.03,60.5)
  Bottom Layer w0.254: C9.2 R5.2 53,61.78 54.28,60.5 v1(57.03,60.5)
NetC10_2: C10.2 R6.2 RGB3.5 | length 12
  Top Layer w0.254: RGB3.5 55.75,54.5 56.53,53.72 v1(56.53,51.5)
  Bottom Layer w0.254: C10.2 53.075,53.545 R6.2 53.03,52.25 53.78,51.5 v1(56.53,51.5)
NetC11_2: C11.2 R7.2 RGB4.5 | length 12.5
  Top Layer w0.254: RGB4.5 55.232,45.268 55.982,45.268 57,44.25 v1(57,42.25)
  Bottom Layer w0.254: C11.2 53.28,46.87 R7.2 53.28,43.22 54.25,42.25 v1(57,42.25)
NetC12_2: C12.2 R8.2 RGB5.5 | length 12.1
  Top Layer w0.254: RGB5.5 56.25,36 57,35.25 v1(57,33)
  Bottom Layer w0.254: C12.2 R8.2 53.5,33.75 54.25,33 v1(57,33)
NetC13_2: C13.2 R9.2 RGB6.5 | length 12.3
  Top Layer w0.254: RGB6.5 56,26.75 56.78,25.97 v1(56.78,23.5)
  Bottom Layer w0.254: C13.2 53.53,28.22 R9.2 53.53,24 54.03,23.5 v1(56.78,23.5)
NetC14_2: C14.2 R10.2 RGB7.5 | length 12.1
  Top Layer w0.254: RGB7.5 56.25,16.75 56.78,16.22 v1(56.78,13.75)
  Bottom Layer w0.254: C14.2 53.25,15.78 R10.2 53.28,14.5 54.03,13.75 v1(56.78,13.75)
NetC15_2: C15.2 R11.2 RGB8.5 | length 12.1
  Top Layer w0.254: RGB8.5 56.25,7.25 56.78,6.72 v1(56.78,4.25)
  Bottom Layer w0.254: C15.2 53.25,6.28 R11.2 53.28,5 54.03,4.25 v1(56.78,4.25)
NetD2_1: D2.1 U3.2 | length 16.8
  Top Layer w0.254: D2.1 9.127,29.877 12.5,33.25 12.5,34.617 17.213,39.33 U3.2
NetD2_2: D2.2 D3.2 R12.1 | length 26.6
  Top Layer w0.254: D3.2 2.5,17.437 2.5,29.75 5.505,32.755 5.505,32.808 5.947,33.25 D2.2 R12.1
NetD3_1: D3.1 U4.2 | length 15.8
  Top Layer w0.254: D3.1 7.063,9.5 9.951,9.5 11.611,11.16 11.611,11.188 16.8,16.378 17.628,16.378 U4.2
NetD4_1: D4.1 U5.2 | length 16.9
  Top Layer w0.254: D4.1 31.313,30.063 34.5,33.25 34.5,35.25 38.5,39.25 39.79,39.25 U5.2
NetD4_2: D4.2 D5.2 R13.1 | length 29.1
  Top Layer w0.254: D5.2 27.447,11.25 27.005,11.692 27.005,11.745 25,13.75 25,30.437 27.505,32.942 27.505,32.995 27.947,33.437 D4.2 R13.1
NetD5_1: D5.1 U6.2 | length 16.1
  Top Layer w0.254: D5.1 30.137,7.877 33.461,11.2 33.461,11.228 38.65,16.418 39.478,16.418 U6.2
NetRGB4_1: RGB4.1 RGB5.2 | length 13.5
  Top Layer w0.254: RGB5.2 49.85,36 47.75,38.1 47.75,45 49.95,47.2 49.95,47.25 RGB4.1
NetRGB5_1: RGB5.1 RGB6.2 | length 12.5
  Top Layer w0.254: RGB6.2 50.3,26.75 51.75,28.2 51.75,36.2 50.35,37.6 RGB5.1
NetRGB6_1: RGB6.1 RGB7.2 | length 13.6
  Top Layer w0.254: RGB7.2 49.8,16.75 48,18.55 48,26.55 49.8,28.35 RGB6.1
NetRGB7_1: RGB7.1 RGB8.2 | length 12.6
  Top Layer w0.254: RGB8.2 50.3,7.25 51.5,8.45 51.5,17.15 50.3,18.35 RGB7.1
Reset!: D1.1 R3.1 S1.3 S1.4 U1.24 | length 30.2
  Top Layer w0.254: S1.3 40.032,45.782 40.032,48.718 S1.4 46.25,48.75 46.992,49.492 46.992,55.008 45.854,56.146 45.041,56.146 D1.1 ; U1.24 43.435,61.8 R3.1 43.515,61.75 v1(45.5,61.75) ; D1.1@44.505,56.505 D1.1@44.505,56.558 ; D1.1@45,56.24 45,57.187 46.484,58.671 v1(46.484,58.687)
  Bottom Layer w0.254: v1(45.5,61.75) 46.484,60.766 v1(46.484,58.687)
RGBControl: J2.1 RGB1.2 U1.21 | length 39.6
  Top Layer w0.254: U1.21 45.15,59.4 47.969,62.219 ; J2.1 46.5,46 48,47.5 48,71.45 49.3,72.75 RGB1.2
RGBCtrl1-2: RGB1.1 RGB2.2 | length 12.4
  Top Layer w0.254: RGB1.1 49.8,74.35 51.25,72.9 51.25,64.7 50.05,63.5 RGB2.2
RGBCtrl2-3: RGB2.1 RGB3.2 | length 12
  Top Layer w0.254: RGB3.2 49.55,54.5 48.508,55.542 48.508,64.058 49.55,65.1 RGB2.1
RGBCtrl3-4: RGB3.1 RGB4.2 | length 12.4
  Top Layer w0.254: RGB3.1 50.05,56.1 51.75,54.4 51.75,46.9 50.35,45.5 RGB4.2
ROW0: J5.1 R12.2 U1.14 | length 55.3
  Top Layer w0.254: v1(3.75,43) 5,43 6,42 R12.2 ; v1(36.75,43.75) 37.2,44.2 U1.14
  Bottom Layer w0.254: v1(3.75,43) 29,43 ; J5.1 26.75,45.25 29,43 ; v1(36.75,43.75) 35.25,43.75 34.5,43 29,43
ROW1: J7.1 R13.2 U1.15 | length 38.1
  Top Layer w0.254: J7.1 23.25,42.75 v1(24.75,41.25) 27.385,41.25 28,40.635 R13.2 ; U1.15 37.984,54.742 37.984,45.541 38.75,44.775 v1(38.75,43.75)
  Bottom Layer w0.254: v1(24.75,41.25) 36.25,41.25 v1(38.75,43.75)
UCAP: C7.2 U1.27 | length 6.1
  Top Layer w0.254: U1.27 37.246,63.287 37.246,64.354 40,67.108 C7.2
uD+: R2.1 U1.29 | length 5.4
  Top Layer w0.254: R2.1 34,66.503 35.6,64.903 U1.29
uD-: R1.1 U1.30 | length 5.9
  Top Layer w0.254: R1.1 31.53,67.72 34.8,64.45 U1.30
USB-VCC: F1.1 J9.1 | length 15.3
  Top Layer w0.254: J9.1 31,73.95 32.995,71.955 F1.1
VCC: C3.2 C4.2 C5.2 C6.2 D1.2 F1.2 R3.2 R4.1 R5.1 R6.1 R7.1 R8.1 R9.1 R10.1 R11.1 RGB1.3 RGB2.3 RGB3.3 RGB4.3 RGB5.3 RGB6.3 RGB7.3 RGB8.3 U1.4 U1.31 U1.32 U2.3 U2.5 | length 82.7
  Top Layer w0.254: D1.2 45,51 v1(45.5,50.5) ; v1(49.55,68.8) RGB1.3
  Bottom Layer w0.254: v1(28.75,53.25) 36,53.25 36.825,54.075 C6.2 36.825,57.15 36.5,57.475 36.5,57.5 36.5,59.675 C4.2 C3.2 36.825,63.675 ; v1(28.75,66) 34.5,66 36.825,63.675 ; v1(42,66) 39.15,66 36.825,63.675 ; v1(45.5,50.5) 48,50.5 48.75,51.25 v1(49.016,51.25) 50.325,51.25 51.47,52.395 R6.1 ; v1(49,4) 50.575,4 51.72,5.145 R11.1 ; v1(49,13.5) 50.575,13.5 51.72,14.645 R10.1 ; v1(49,42.25) 50.575,42.25 51.72,43.395 R7.1 ; v1(49.22,32.75) 50.795,32.75 51.94,33.895 R8.1 ; v1(49.25,23.75) 50.825,23.75 51.97,24.895 R9.1 ; v1(49.55,68.8) 50.35,68 52.75,68 ; R4.1 51.19,69.56 52.75,68 ; R5.1 51.44,60.81 v1(52.25,60) ; v1(56.75,68) 52.75,68
XTAL1: C1.2 U1.1 Y1.2 | length 11.3
  Top Layer w0.254: C1.2@21,62.3 24.64,62.3 Y1.2 25.687,61.44 26.047,61.8 U1.1
XTAL2: C2.2 U1.2 Y1.1 | length 14.3
  Top Layer w0.254: C2.2 21.1,56 24.94,56 Y1.1 25.5,59 27.5,61 U1.2
pads on no net: J9.4 RGB1.4 RGB2.4 RGB3.4 RGB4.4 RGB5.4 RGB6.4 RGB7.4 RGB8.1 RGB8.4 U1.5 U1.6 U1.7 U1.8 U1.9 U1.10 U1.11 U1.16 U1.17 U1.22 U1.23 U1.25 U1.26 U2.6 U2.7 U3.3 U3.4 U3.5 U3.6 U3.PE U4.3 U4.4 U4.5 U4.6 U4.PE U5.3 U5.4 U5.5 U5.6 U5.PE U6.3 U6.4 U6.5 U6.6 U6.PE

## Polygon pours and split planes (outlines as drawn)
VCC on Top Layer "VCC_L01_P000" (solid, pour order 0): 0.711,79.211 59.211,79.211 59.211,1 0.711,1
GND on Bottom Layer "GND_L02_P001" (solid, pour order 1): 0.711,79.211 59.211,79.211 59.211,0.953 0.711,0.953

## Silkscreen, mask and mechanical layers (free items; w line width, h text height)
Bottom Overlay:
  text "Media Controller V1.0" at 25.8,44.95 h0.7
  text "Made By: Adam Jovanovic" at 25.8,43.683 h0.7
Board Outline:
  lines w0.2: 0,0 0,80 60,80 60,0 0,0

## Text inside footprints (layer, text, board x,y; h text height)
C1: Mechanical 7 "0.022in/0.55mm" at 25.133,59.802 h0.64 r90; Mechanical 7 "0.067in/1.7mm" at 17.502,59.436 h0.64 r90; Mechanical 7 "0.035in/0.9mm" at 21.318,65.398 h0.64 r90; Mechanical 7 "Alternate 2 Padstyle: b229_152h76" at 33.363,51.022 h1.27 r90; Mechanical 7 "Alternate 1 Padstyle: b152_229h76" at 30.823,51.022 h1.27 r90; Mechanical 7 "Default Padstyle: r80_85" at 28.283,53.88 h1.27 r90
C2: Mechanical 7 "0.022in/0.55mm" at 16.867,58.197 h0.64 r270; Mechanical 7 "0.067in/1.7mm" at 24.498,58.564 h0.64 r270; Mechanical 7 "0.035in/0.9mm" at 20.683,52.602 h0.64 r270; Mechanical 7 "Alternate 2 Padstyle: b229_152h76" at 8.637,66.977 h1.27 r270; Mechanical 7 "Alternate 1 Padstyle: b152_229h76" at 11.177,66.977 h1.27 r270; Mechanical 7 "Default Padstyle: r80_85" at 13.717,64.12 h1.27 r270
C3: Mechanical 7 "0.02in/0.5mm" at 34.645,67.158 h0.64 r180; Mechanical 7 "0.069in/1.75mm" at 33.777,59.477 h0.64 r180; Mechanical 7 "0.037in/0.95mm" at 39.923,63.317 h0.64 r180; Mechanical 7 "Alternate 2 Padstyle: b229_152h76" at 25.522,75.438 h1.27 r180; Mechanical 7 "Alternate 1 Padstyle: b152_229h76" at 25.522,72.898 h1.27 r180; Mechanical 7 "Default Padstyle: r120_100" at 27.745,70.358 h1.27 r180
C4: Mechanical 7 "0.02in/0.5mm" at 34.645,64.158 h0.64 r180; Mechanical 7 "0.069in/1.75mm" at 33.777,56.477 h0.64 r180; Mechanical 7 "0.037in/0.95mm" at 39.923,60.317 h0.64 r180; Mechanical 7 "Alternate 2 Padstyle: b229_152h76" at 25.522,72.438 h1.27 r180; Mechanical 7 "Alternate 1 Padstyle: b152_229h76" at 25.522,69.898 h1.27 r180; Mechanical 7 "Default Padstyle: r120_100" at 27.745,67.358 h1.27 r180
C6: Mechanical 7 "0.02in/0.5mm" at 34.645,59.158 h0.64 r180; Mechanical 7 "0.069in/1.75mm" at 33.777,51.477 h0.64 r180; Mechanical 7 "0.037in/0.95mm" at 39.923,55.317 h0.64 r180; Mechanical 7 "Alternate 2 Padstyle: b229_152h76" at 25.522,67.438 h1.27 r180; Mechanical 7 "Alternate 1 Padstyle: b152_229h76" at 25.522,64.898 h1.27 r180; Mechanical 7 "Default Padstyle: r120_100" at 27.745,62.358 h1.27 r180
C7: Mechanical 7 "0.02in/0.5mm" at 35.842,70.355 h0.64 r270; Mechanical 7 "0.069in/1.75mm" at 43.523,71.222 h0.64 r270; Mechanical 7 "0.037in/0.95mm" at 39.682,65.077 h0.64 r270; Mechanical 7 "Alternate 2 Padstyle: b229_152h76" at 27.562,79.477 h1.27 r270; Mechanical 7 "Alternate 1 Padstyle: b152_229h76" at 30.102,79.477 h1.27 r270; Mechanical 7 "Default Padstyle: r120_100" at 32.642,77.255 h1.27 r270
C8: Mechanical 7 "0.02in/0.5mm" at 50.57,78.408 h0.64 r180; Mechanical 7 "0.069in/1.75mm" at 49.702,70.727 h0.64 r180; Mechanical 7 "0.037in/0.95mm" at 55.848,74.568 h0.64 r180; Mechanical 7 "Alternate 2 Padstyle: b229_152h76" at 41.447,86.688 h1.27 r180; Mechanical 7 "Alternate 1 Padstyle: b152_229h76" at 41.447,84.148 h1.27 r180; Mechanical 7 "Default Padstyle: r120_100" at 43.67,81.608 h1.27 r180
C9: Mechanical 7 "0.02in/0.5mm" at 50.82,69.158 h0.64 r180; Mechanical 7 "0.069in/1.75mm" at 49.952,61.477 h0.64 r180; Mechanical 7 "0.037in/0.95mm" at 56.098,65.318 h0.64 r180; Mechanical 7 "Alternate 2 Padstyle: b229_152h76" at 41.697,77.438 h1.27 r180; Mechanical 7 "Alternate 1 Padstyle: b152_229h76" at 41.697,74.898 h1.27 r180; Mechanical 7 "Default Padstyle: r120_100" at 43.92,72.358 h1.27 r180
C10: Mechanical 7 "0.02in/0.5mm" at 50.895,60.158 h0.64 r180; Mechanical 7 "0.069in/1.75mm" at 50.027,52.477 h0.64 r180; Mechanical 7 "0.037in/0.95mm" at 56.173,56.317 h0.64 r180; Mechanical 7 "Alternate 2 Padstyle: b229_152h76" at 41.772,68.438 h1.27 r180; Mechanical 7 "Alternate 1 Padstyle: b152_229h76" at 41.772,65.898 h1.27 r180; Mechanical 7 "Default Padstyle: r120_100" at 43.995,63.358 h1.27 r180
C11: Mechanical 7 "0.02in/0.5mm" at 50.97,51.158 h0.64 r180; Mechanical 7 "0.069in/1.75mm" at 50.102,43.477 h0.64 r180; Mechanical 7 "0.037in/0.95mm" at 56.248,47.317 h0.64 r180; Mechanical 7 "Alternate 2 Padstyle: b229_152h76" at 41.847,59.438 h1.27 r180; Mechanical 7 "Alternate 1 Padstyle: b152_229h76" at 41.847,56.898 h1.27 r180; Mechanical 7 "Default Padstyle: r120_100" at 44.07,54.358 h1.27 r180
C12: Mechanical 7 "0.02in/0.5mm" at 51.32,41.658 h0.64 r180; Mechanical 7 "0.069in/1.75mm" at 50.452,33.977 h0.64 r180; Mechanical 7 "0.037in/0.95mm" at 56.598,37.818 h0.64 r180; Mechanical 7 "Alternate 2 Padstyle: b229_152h76" at 42.197,49.938 h1.27 r180; Mechanical 7 "Alternate 1 Padstyle: b152_229h76" at 42.197,47.398 h1.27 r180; Mechanical 7 "Default Padstyle: r120_100" at 44.42,44.858 h1.27 r180
C13: Mechanical 7 "0.02in/0.5mm" at 51.32,32.408 h0.64 r180; Mechanical 7 "0.069in/1.75mm" at 50.452,24.727 h0.64 r180; Mechanical 7 "0.037in/0.95mm" at 56.598,28.568 h0.64 r180; Mechanical 7 "Alternate 2 Padstyle: b229_152h76" at 42.197,40.688 h1.27 r180; Mechanical 7 "Alternate 1 Padstyle: b152_229h76" at 42.197,38.148 h1.27 r180; Mechanical 7 "Default Padstyle: r120_100" at 44.42,35.608 h1.27 r180
C14: Mechanical 7 "0.02in/0.5mm" at 51.07,22.408 h0.64 r180; Mechanical 7 "0.069in/1.75mm" at 50.202,14.727 h0.64 r180; Mechanical 7 "0.037in/0.95mm" at 56.348,18.568 h0.64 r180; Mechanical 7 "Alternate 2 Padstyle: b229_152h76" at 41.947,30.688 h1.27 r180; Mechanical 7 "Alternate 1 Padstyle: b152_229h76" at 41.947,28.148 h1.27 r180; Mechanical 7 "Default Padstyle: r120_100" at 44.17,25.608 h1.27 r180
C15: Mechanical 7 "0.02in/0.5mm" at 51.07,12.908 h0.64 r180; Mechanical 7 "0.069in/1.75mm" at 50.202,5.227 h0.64 r180; Mechanical 7 "0.037in/0.95mm" at 56.348,9.068 h0.64 r180; Mechanical 7 "Alternate 2 Padstyle: b229_152h76" at 41.947,21.188 h1.27 r180; Mechanical 7 "Alternate 1 Padstyle: b152_229h76" at 41.947,18.648 h1.27 r180; Mechanical 7 "Default Padstyle: r120_100" at 44.17,16.108 h1.27 r180
D1: Mechanical 7 "0.114in/2.896mm" at 40.364,56.881 h0.64 r270; Mechanical 7 "0.075in/1.905mm" at 44.682,47.464 h0.64 r270; Mechanical 7 "0.047in/1.194mm" at 44.682,49.496 h0.64 r270; Mechanical 7 "0.033in/0.838mm" at 47.375,58.418 h0.64 r270; Mechanical 7 "0.154in/3.912mm" at 49.915,56.881 h0.64 r270; Mechanical 7 "Alt 2 Padstyle: b229_152h76" at 32.313,63.073 h1.27 r270; Mechanical 7 "Alt 1 Padstyle: b152_229h76" at 34.218,63.073 h1.27 r270; Mechanical 7 "Default Padstyle: r114_124" at 36.123,62.755 h1.27 r270
D2: Mechanical 7 "0.114in/2.896mm" at 10.635,29.182 h0.64 r90; Mechanical 7 "0.075in/1.905mm" at 6.317,38.599 h0.64 r90; Mechanical 7 "0.047in/1.194mm" at 6.317,36.567 h0.64 r90; Mechanical 7 "0.033in/0.838mm" at 3.625,27.645 h0.64 r90; Mechanical 7 "0.154in/3.912mm" at 1.085,29.182 h0.64 r90; Mechanical 7 "Alt 2 Padstyle: b229_152h76" at 18.687,22.991 h1.27 r90; Mechanical 7 "Alt 1 Padstyle: b152_229h76" at 16.782,22.991 h1.27 r90; Mechanical 7 "Default Padstyle: r114_124" at 14.877,23.308 h1.27 r90
D3: Mechanical 7 "0.114in/2.896mm" at 10.386,10.119 h0.64 r90; Mechanical 7 "0.075in/1.905mm" at 6.068,19.536 h0.64 r90; Mechanical 7 "0.047in/1.194mm" at 6.068,17.504 h0.64 r90; Mechanical 7 "0.033in/0.838mm" at 3.375,8.582 h0.64 r90; Mechanical 7 "0.154in/3.912mm" at 0.835,10.119 h0.64 r90; Mechanical 7 "Alt 2 Padstyle: b229_152h76" at 18.437,3.928 h1.27 r90; Mechanical 7 "Alt 1 Padstyle: b152_229h76" at 16.532,3.928 h1.27 r90; Mechanical 7 "Default Padstyle: r114_124" at 14.627,4.245 h1.27 r90
D4: Mechanical 7 "0.114in/2.896mm" at 32.635,29.369 h0.64 r90; Mechanical 7 "0.075in/1.905mm" at 28.317,38.786 h0.64 r90; Mechanical 7 "0.047in/1.194mm" at 28.317,36.754 h0.64 r90; Mechanical 7 "0.033in/0.838mm" at 25.625,27.832 h0.64 r90; Mechanical 7 "0.154in/3.912mm" at 23.085,29.369 h0.64 r90; Mechanical 7 "Alt 2 Padstyle: b229_152h76" at 40.687,23.177 h1.27 r90; Mechanical 7 "Alt 1 Padstyle: b152_229h76" at 38.782,23.177 h1.27 r90; Mechanical 7 "Default Padstyle: r114_124" at 36.877,23.495 h1.27 r90
D5: Mechanical 7 "0.114in/2.896mm" at 32.135,7.182 h0.64 r90; Mechanical 7 "0.075in/1.905mm" at 27.817,16.599 h0.64 r90; Mechanical 7 "0.047in/1.194mm" at 27.817,14.567 h0.64 r90; Mechanical 7 "0.033in/0.838mm" at 25.125,5.645 h0.64 r90; Mechanical 7 "0.154in/3.912mm" at 22.585,7.182 h0.64 r90; Mechanical 7 "Alt 2 Padstyle: b229_152h76" at 40.187,0.991 h1.27 r90; Mechanical 7 "Alt 1 Padstyle: b152_229h76" at 38.282,0.991 h1.27 r90; Mechanical 7 "Default Padstyle: r114_124" at 36.377,1.308 h1.27 r90
U1: Mechanical 7 "0.276in/7.01mm" at 23.884,58.682 h0.64; Mechanical 7 "0.276in/7.01mm" at 33.777,50.694 h0.64; Mechanical 7 "0.364in/9.246mm" at 45.576,58.682 h0.64; Mechanical 7 "0.364in/9.246mm" at 33.619,68.576 h0.64; Mechanical 7 "0.03in/0.762mm" at 38.019,66.671 h0.64; Mechanical 7 "0.031in/0.8mm" at 43.671,61.082 h0.64; Mechanical 7 "Default Vert Padstyle: r52_146" at 26.475,46.122 h1.27; Mechanical 7 "Default Horiz Padstyle: r52_146" at 26.157,47.392 h1.27; Top Overlay "*" at 30.275,62.6 h1.27; Mechanical 13 "*" at 32.68,61.184 h1.27; Mechanical 29 "*" at 30.2,62.6 h1.27; Mechanical 29 "`.Designator`" at 32.7,58.833 h0.7
U2: Mechanical 7 "0.197in/5mm" at 12.571,75.286 h0.64 r180; Mechanical 7 "0.098in/2.5mm" at 14.139,72.746 h0.64 r180; Mechanical 7 "0.197in/5mm" at 12.571,49.725 h0.64 r180; Mechanical 7 "0.488in/12.395mm" at 13.365,46.457 h0.64 r180; Mechanical 7 "0.541in/13.75mm" at -4.771,62.505 h0.64 r180; Mechanical 7 "0.295in/7.493mm" at 31.996,65.634 h0.64 r180; Mechanical 7 "0.52in/13.208mm" at 37.076,62.522 h0.64 r180; Mechanical 7 "0.02in/0.508mm" at 0.767,69.126 h0.64 r180; Mechanical 7 "Alt 2 Padstyle: OX90Y60D30P" at 19.397,85.7 h1.27 r180; Mechanical 7 "Alt 1 Padstyle: OX60Y90D30P" at 19.397,84.43 h1.27 r180; Mechanical 7 "Top Pad Padstyle: RX118Y91D0T" at 20.032,83.16 h1.27 r180; Mechanical 7 "Mounting Pad 3 Padstyle: EX83Y83D63P" at 22.255,81.89 h1.27 r180; Mechanical 7 "Mounting Pad 2 Padstyle: EX58Y58D38P" at 22.255,80.62 h1.27 r180; Mechanical 7 "Mounting Pad 1 Padstyle: RX79Y83D0T" at 21.937,79.35 h1.27 r180; Mechanical 7 "Default Padstyle: EX59Y59D39P" at 20.032,78.08 h1.27 r180; Top Overlay "*" at 15.275,57.2 h1.27 r180; Mechanical 13 "*" at 13.643,57.218 h1.27 r180